# Altium PCB baseControl.PcbDoc
Units mil, origin at the board's own origin, x right, y up, seen from the top; angles counter-clockwise.
Board outline 11915 x 7730 mil, 2 copper layers (Top Layer, Bottom Layer); 108 components, 116 nets, 581 pads, 4 vias.
Unrouted connection lines stored in the file: 430.
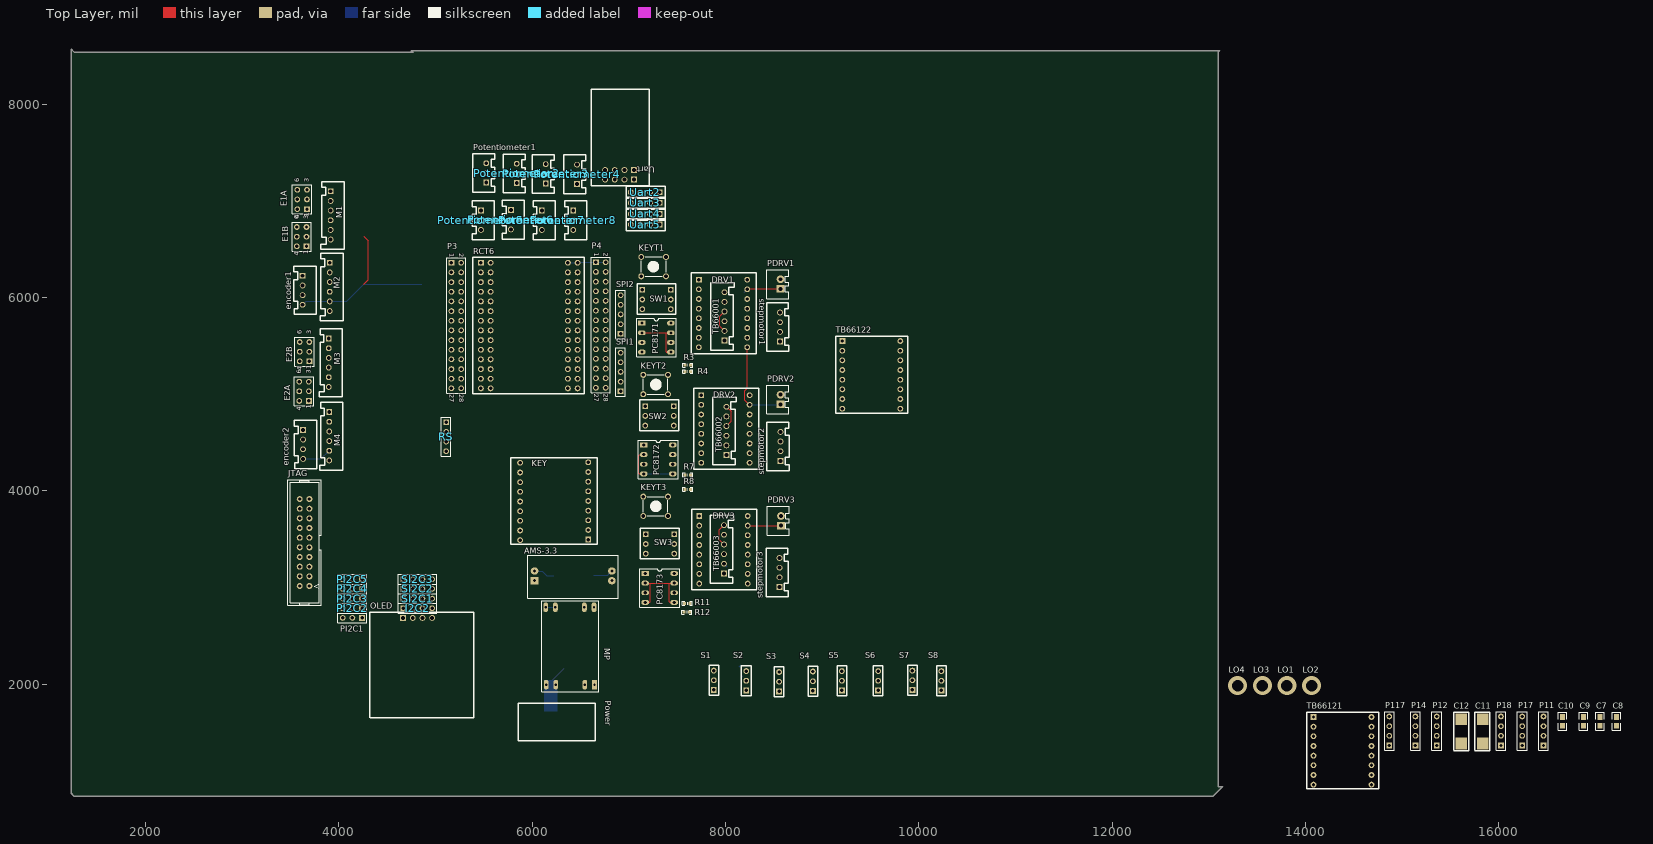
[diagram p0: Top Layer view]
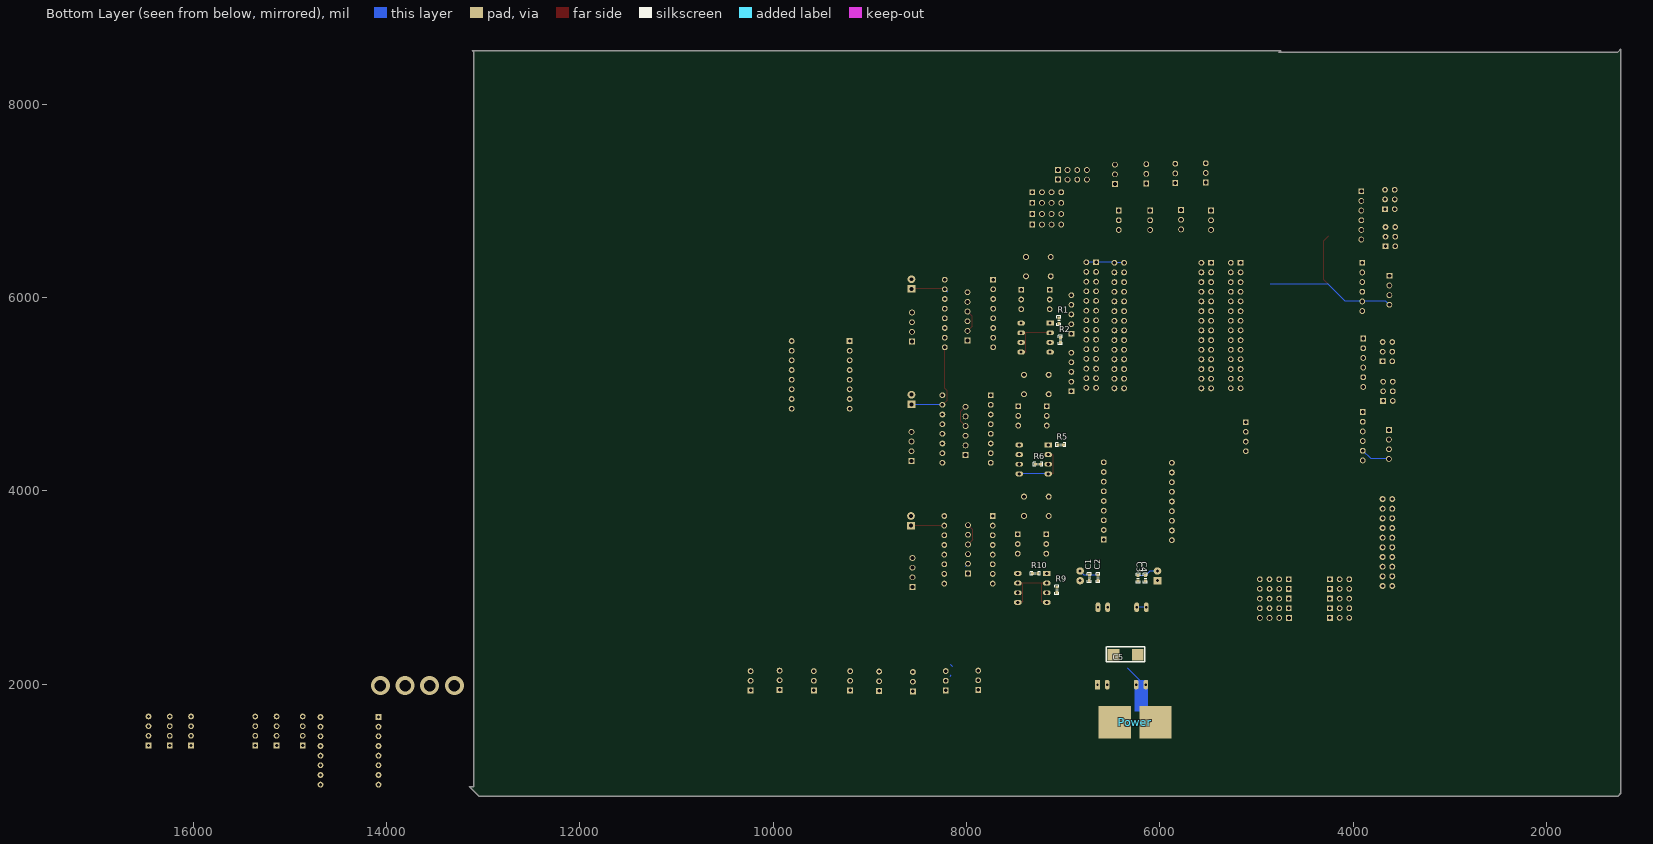
[diagram p1: Bottom Layer view, seen from below]

## Layer stack, top to bottom
Top Layer: signal copper 1.4
Dielectric: dielectric 12.6, FR-4, Dk 4.8
Bottom Layer: signal copper 1.4

## Board outline
4770,8540 1260,8540 1230,8570 1230,870 1260,840 13045,840 13145,940 13100,940 13100,8540 13115,8555 4755,8555 4740,8540

## Design rules (kind name [scope] priority, off if disabled: settings)
Clearance [All] p1: gap=5
PolygonConnect [All] p1: connectstyle=Relief reliefconductorwidth=10 reliefentries=4 polygonreliefangle="90 Angle"
RoutingVias [All] p1: holewidth=28 width=50 viastyle="Through Hole" minholewidth=28 minwidth=50 maxholewidth=28 maxwidth=50
SilkscreenOverComponentPads [All] p1: minsilkscreentomaskgap=10
SolderMaskExpansion [All] p1: expansion=4
Width Width_1 [InNet('VCC5')] p1: maxlimit=25 minlimit=20 preferedwidth=20
Width [InNet('VCC12')] p2: maxlimit=30 minlimit=25 preferedwidth=25
27 further rules are at their usual default settings.

## Classes and differential pairs
component class baseControl2: DRV3 E2A E2B encoder2 KEY KEYT1 KEYT2 KEYT3 LO1 LO2 LO3 LO4 P3 P4 PC8173 Potentiometer1 Potentiometer2 Potentiometer3 Potentiometer4 Potentiometer5 Potentiometer6 Potentiometer7 Potentiometer8 R9 R10 R11 R12 S5 S6 S7 S8 stepmotor1 stepmotor2 stepmotor3 SW1 SW2 SW3 TB66001 TB66002 TB66003
component class baseControl: AMS-3.3 C1 C2 C3 C4 C5 C7 C8 C9 C10 C11 C12 DRV1 DRV2 E1A E1B encoder1 I2C2 JTAG M1 M2 M3 M4 MP OLED P11 P12 P14 P17 P18 P117 PC8171 PC8172 PDRV1 PDRV2 PDRV3 PI2C1 PI2C2 PI2C3 PI2C4 PI2C5 Power R1 R2 R3 R4 R5 R6 R7 R8 RCT6 RS S1 S2 S3 S4 SI2C1 SI2C2 SI2C3 SPI1 SPI2 TB66121 TB66122 Uart Uart2 Uart3 Uart4 Uart5

## Components (designator, comment, footprint, x,y, rotation, side; value= is the part's Value field where it differs from the comment)
AMS-3.3 "AMS1117-3.3" AMS1117-3.3 6820,3070 r180 top
C1 "104" 0603P 6730,3100 r90 bottom
C2 "104" 0603P 6640,3100 r90 bottom
C3 "104" 0603P 6225,3095 r90 bottom
C4 "104" 0603P 6150,3095 r90 bottom
C5 "220uF" 钽电容E 6380,2165 r180 bottom
C7 "104" 0805 17050,1570 r90 top
C8 "104" 0805 17220,1570 r90 top
C9 "104" 0805 16880,1570 r90 top
C10 "104" 0805 16660,1570 r90 top
C11 "220uF" 钽电容E 15975,1485 r90 top
C12 "220uF" 钽电容E 15755,1485 r90 top
DRV1 "DRV8825" DRV8825 7920,6120 r0 top
DRV2 "DRV8825" DRV8825 7945,4925 r0 top
DRV3 "DRV8825" DRV8825 7925,3675 r0 top
E1A "Header 3X2A" HDR2X3_CEN 3670,6915 r90 top
E1B "Header 3X2A" HDR2X3_CEN 3665,6530 r90 top
E2A "Header 3X2A" HDR2X3_CEN 3690,4930 r90 top
E2B "Header 3X2A" HDR2X3_CEN 3695,5340 r90 top
encoder1 "encoder1" XH-4-254 4815,4860 r270 top
encoder2 "encoder2" XH-4-254 4820,3265 r270 top
I2C2 "Header 4" HDR1X4 4665,2785 r0 top
JTAG "JTAG" JTAG_20 3645,3465 r90 top
KEY "KEY" KEY 6000,3745 r180 top
KEYT1 "KEY" KEY_M 7385,6220 r180 top
KEYT2 "KEY" KEY_M 7150,5200 r0 top
KEYT3 "KEY" KEY_M 7150,3940 r0 top
LO1 "螺丝孔" VIA 13810,1985 r0 top
LO2 "螺丝孔" VIA 14065,1985 r0 top
LO3 "螺丝孔" VIA 13555,1985 r0 top
LO4 "螺丝孔" VIA 13300,1985 r0 top
M1 "motor" XH-6-254 4320,7255 r270 top
M2 "motor" XH-6-254 4310,6515 r270 top
M3 "motor" XH-6-254 4300,5730 r270 top locked
M4 "motor" XH-6-254 4305,4970 r270 top locked
MP "MP1584EN" MP1584EN 6590,2560 r270 top
OLED "OLED" OLED_12864 4520,2545 r0 top
P3 "Header 14X2" HDR2X14 5165,6360 r270 top
P4 "Header 14X2" HDR2X14 6660,6365 r270 top
P11 "Header 4" HDR1X4 16465,1365 r90 top
P12 "Header 4" HDR1X4 15360,1365 r90 top
P14 "Header 4" HDR1X4 15140,1365 r90 top
P17 "Header 4" HDR1X4 16245,1365 r90 top
P18 "Header 4" HDR1X4 16025,1365 r90 top
P117 "Header 4" HDR1X4 14870,1365 r90 top
PC8171 "PC817" DIP4 7365,5905 r0 top
PC8172 "PC817" DIP4 7385,4645 r0 top
PC8173 "PC817" DIP4 7400,3315 r0 top
PDRV1 "XH2.54-2P" XH2.54-2P 8575,6140 r90 top
PDRV2 "XH2.54-2P" XH2.54-2P 8575,4945 r90 top
PDRV3 "XH2.54-2P" XH2.54-2P 8580,3690 r90 top
PI2C1 "Header 3" HDR1X3 4240,2685 r180 top
PI2C2 "Header 3" HDR1X3 4240,2785 r180 top
PI2C3 "Header 3" HDR1X3 4240,2885 r180 top
PI2C4 "Header 3" HDR1X3 4240,2985 r180 top
PI2C5 "Header 3" HDR1X3 4240,3085 r180 top
Potentiometer1 "Potentiometer" Potentiometer 5525,7190 r90 top
Potentiometer2 "Potentiometer" Potentiometer 5840,7185 r90 top
Potentiometer3 "Potentiometer" Potentiometer 6140,7180 r90 top
Potentiometer4 "Potentiometer" Potentiometer 6465,7175 r90 top
Potentiometer5 "Potentiometer" Potentiometer 5470,6900 r270 top
Potentiometer6 "Potentiometer" Potentiometer 5780,6905 r270 top
Potentiometer7 "Potentiometer" Potentiometer 6100,6900 r270 top
Potentiometer8 "Potentiometer" Potentiometer 6425,6900 r270 top
Power "P" Power 6485,1620 r180 top
R1 "1.5K" 0603P 7045,5760 r90 bottom
R2 "1.5K" 0603P 7030,5560 r90 bottom
R3 "1.5K" 0603P 7610,5300 r180 top
R4 "1.5K" 0603P 7610,5235 r0 top
R5 "1.5K" 0603P 7025,4475 r180 bottom
R6 "1.5K" 0603P 7260,4275 r0 bottom
R7 "1.5K" 0603P 7610,4165 r180 top
R8 "1.5K" 0603P 7610,4015 r0 top
R9 "1.5K" 0603P 7065,2975 r90 bottom
R10 "1.5K" 0603P 7290,3145 r0 bottom
R11 "1.5K" 0603P 7605,2835 r180 top
R12 "1.5K" 0603P 7600,2745 r0 top
RCT6 "RCT6" STM32F1RCT6 5735,6290 r0 top
RS "Header 4" HDR1X4 5110,4710 r270 top
S1 "sever" 3Pin 7880,1940 r90 top
S2 "sever" 3Pin 8215,1935 r90 top
S3 "sever" 3Pin 8555,1925 r90 top
S4 "sever" 3Pin 8905,1930 r90 top
S5 "sever" 3Pin 9205,1935 r90 top
S6 "sever" 3Pin 9580,1935 r90 top
S7 "sever" 3Pin 9935,1940 r90 top
S8 "sever" 3Pin 10235,1935 r90 top
SI2C1 "Header 4" HDR1X4 4665,2885 r0 top
SI2C2 "Header 4" HDR1X4 4665,2985 r0 top
SI2C3 "Header 4" HDR1X4 4665,3085 r0 top
SPI1 "Header 5" HDR1X5 6915,5030 r90 top
SPI2 "Header 5" HDR1X5 6915,5625 r90 top
stepmotor1 "stepmotor" XH-4-254 7375,6910 r90 top
stepmotor2 "stepmotor" XH-4-254 7380,5675 r90 top
stepmotor3 "stepmotor" XH-4-254 7370,4370 r90 top
SW1 "SW_DIP3" SW_DIP3 7410,6105 r0 top
SW2 "SW_DIP3" SW_DIP3 7440,4900 r0 top
SW3 "SW_DIP3" SW_DIP3 7445,3575 r0 top
TB66001 "TB6600" XH-6-254 7585,5400 r90 top
TB66002 "TB6600" XH-6-254 7605,4215 r90 top
TB66003 "TB6600" XH-6-254 7580,2990 r90 top
TB66121 "TB6612" TB6612 18670,-1885 r0 top
TB66122 "TB6612" TB6612 13795,2005 r0 top
Uart "Uart" uartModel 7050,7230 r180 top
Uart2 "Uart" uart 7025,7100 r180 top
Uart3 "Uart" uart 7025,6990 r180 top
Uart4 "Uart" uart 7025,6875 r180 top
Uart5 "Uart" uart 7025,6765 r180 top

## Footprints (in the part's own frame and the unit in brackets; to place one, negate y for a bottom-side part, rotate by r counter-clockwise, add the part's x,y. Pads: shape width x height; smd on the part's side, far side on the other; paste and mask are expansions set on the pad)
3Pin [mil]
  rect 60x60 hole 35: 1(0,0)
  round 60 hole 35: 2(100,0) 3(200,0)
  silkscreen extent -55,-50 255,50
0603P [mil]
  rect 30x30 smd: 1(-27,0) 2(27.5,-0.06)
  silkscreen extent -50,-20 50,20
0805 [mil]
  rect 60x50 smd: 1(0,-0.06) 2(90,-0.06)
  silkscreen extent -50,-45 140,45
AMS1117-3.3 [mil]
  oval 80x75 hole 32: 1(-5,0) 2(-5,-100) 3(795,-100)
  rect 80x75 hole 32: 4(795,0)
  silkscreen extent -70,-265 865,180
DIP4 [mil]
  rect 80x50 hole 32: 1(-230,-170)
  oval 80x50 hole 32: 2(-230,-270) 3(-230,-370) 4(-230,-470) 5(70,-470) 6(70,-370) 7(70,-270) 8(70,-170)
  silkscreen extent -285,-520 125,-120
DRV8825 [mil]
  rect 60x60 hole 35: 1(-195,65)
  round 60 hole 35: 2(-195,-35) 3(-195,-135) 4(-195,-235) 5(-195,-335) 6(-195,-435) 7(-195,-535) 8(-195,-635) 9(305,-635) 10(305,-535) 11(305,-435) 12(305,-335) 13(305,-235) 14(305,-135) 15(305,-35) 16(305,65)
  silkscreen extent -275,-700 400,135
HDR1X3 [mm] "Connector; Header; 3 Position"
  rect 1.5x1.5 hole 0.9: 1(0,0)
  round 1.5 hole 0.9: 2(2.54,0) 3(5.08,0)
  silkscreen extent -1.27,-1.27 6.35,1.27
HDR1X4 [mm] "Connector; Header; 4 Position"
  rect 1.5x1.5 hole 0.9: 1(0,0)
  round 1.5 hole 0.9: 2(2.54,0) 3(5.08,0) 4(7.62,0)
  silkscreen extent -1.27,-1.27 8.89,1.27
HDR1X5 [mm] "Connector; Header; 5 Position"
  rect 1.5x1.5 hole 0.9: 1(0,0)
  round 1.5 hole 0.9: 2(2.54,0) 3(5.08,0) 4(7.62,0) 5(10.16,0)
  silkscreen extent -1.27,-1.27 11.43,1.27
HDR2X3_CEN [mm] "Connector; Header; 3x2 Position"
  rect 1.5x1.5 hole 0.9: 1(0,0)
  round 1.5 hole 0.9: 2(2.54,0) 3(5.08,0) 4(0,2.54) 5(2.54,2.54) 6(5.08,2.54)
  silkscreen extent -1.27,-1.27 6.35,3.81
HDR2X14 [mm] "Connector; Header; 14x2 Position"
  rect 1.5x1.5 hole 0.9: 1(0,0)
  round 1.5 hole 0.9: 2(0,2.54) 3(2.54,0) 4(2.54,2.54) 5(5.08,0) 6(5.08,2.54) 7(7.62,0) 8(7.62,2.54) 9(10.16,0) 10(10.16,2.54) 11(12.7,0) 12(12.7,2.54) 13(15.24,0) 14(15.24,2.54) 15(17.78,0) 16(17.78,2.54) 17(20.32,0) 18(20.32,2.54) 19(22.86,0) 20(22.86,2.54) 21(25.4,0) 22(25.4,2.54) 23(27.94,0) 24(27.94,2.54) 25(30.48,0) 26(30.48,2.54) 27(33.02,0) 28(33.02,2.54)
  silkscreen extent -1.27,-1.27 34.29,3.81
JTAG_20 [mil]
  round 62 hole 35: 1(-450,-50) 2(-450,50) 3(-350,-50) 4(-350,50) 5(-250,-50) 6(-250,50) 7(-150,-50) 8(-150,50) 9(-50,-50) 10(-50,50) 11(50,-50) 12(50,50) 13(150,-50) 14(150,50) 15(250,-50) 16(250,50) 17(350,-50) 18(350,50) 19(450,-50) 20(450,50)
  silkscreen extent -650,-175 650,175
KEY [mil]
  rect 60x60 hole 35: 1(-580,250)
  round 60 hole 35: 2(-580,150) 3(-580,50) 4(-580,-50) 5(-580,-150) 6(-580,-250) 7(-580,-350) 8(-580,-450) 9(-580,-550) 10(125,-545) 11(125,-445) 12(125,-345) 13(125,-245) 14(125,-145) 15(125,-45) 16(125,55) 17(125,155) 18(125,255)
  silkscreen extent -675,-595 220,300
KEY_M [mil]
  round 62 hole 38: 1(0,0) 1(255.91,0) 2(0,-200) 2(255.91,-200)
  silkscreen extent 0,-200 255,0
MP1584EN [mil]
  rect 100x50 hole 25: 1(565,55)
  oval 100x50 hole 25: 2(565,-45) 3(565,-345) 4(565,-445) 5(-235,-450) 6(-235,-350) 7(-235,-50) 8(-235,50)
  silkscreen extent -300,-490 640,100
OLED_12864 [mil]
  rect 60x60 hole 40: 1(145,140)
  round 60 hole 40: 2(245,140) 3(345,140) 4(445,140)
  silkscreen extent -200,-895 875,200
Potentiometer [mil]
  rect 60x60 hole 40: 1(0,0)
  round 60 hole 40: 2(100,0) 3(200,0)
  silkscreen extent -100,-90 300,140
Power [mil]
  rect 334.65x334.65 smd far side: 1(20,15) 2(440,15)
  silkscreen extent -170,-180 630,205
STM32F1RCT6 [mil]
  rect 60x60 hole 35: 1(-265,70)
  round 60 hole 35: 2(-165,70) 3(-265,-30) 4(-165,-30) 5(-265,-130) 6(-165,-130) 7(-265,-230) 8(-165,-230) 9(-265,-330) 10(-165,-330) 11(-265,-430) 12(-165,-430) 13(-265,-530) 14(-165,-530) 15(-265,-630) 16(-165,-630) 17(-265,-730) 18(-165,-730) 19(-265,-830) 20(-165,-830) 21(-265,-930) 22(-165,-930) 23(-265,-1030) 24(-165,-1030) 25(-265,-1130) 26(-165,-1130) 27(-265,-1230) 28(-165,-1230) 29(635,-1230) 30(735,-1230) 31(635,-1130) 32(735,-1130) 33(635,-1030) 34(735,-1030) 35(635,-930) 36(735,-930) 37(635,-830) 38(735,-830) 39(635,-730) 40(735,-730) 41(635,-630) 42(735,-630) 43(635,-530) 44(735,-530) 45(635,-430) 46(735,-430) 47(635,-330) 48(735,-330) 49(635,-230) 50(735,-230) 51(635,-130) 52(735,-130) 53(635,-30) 54(735,-30) 55(635,70) 56(735,70)
  silkscreen extent -350,-1285 805,125
SW_DIP3 [mil]
  rect 60x60 hole 35: 1(-270,-25) 2(25,-25)
  round 60 hole 35: 3(-270,-125) 4(25,-125) 5(-270,-225) 6(25,-225)
  silkscreen extent -325,-280 75,40
TB6612 [mil]
  rect 60x60 hole 35: 1(-4585,3545)
  round 60 hole 35: 2(-4585,3445) 3(-4585,3345) 4(-4585,3245) 5(-4585,3145) 6(-4585,3045) 7(-4585,2945) 8(-4585,2845) 9(-3985,2845) 10(-3985,2945) 11(-3985,3045) 12(-3985,3145) 13(-3985,3245) 14(-3985,3345) 15(-3985,3445) 16(-3985,3545)
  silkscreen extent -4655,2800 -3910,3595
uart [mil]
  rect 60x60 hole 40: 1(-295,10)
  round 60 hole 40: 2(-195,10) 3(-95,10) 4(5,10)
  silkscreen extent -350,-50 50,75
uartModel [mil]
  rect 60x60 hole 40: 1(-5,10) 1(-5,-90)
  round 60 hole 40: 2(95,10) 2(95,-90) 3(195,-90) 3(195,10) 4(295,-90) 4(295,10)
  silkscreen extent -160,-925 440,75
VIA [mil]
XH2.54-2P [mil]
  rect 80x80 hole 40: 1(-50,5)
  round 80 hole 40: 2(50,5)
  silkscreen extent -150,-80 150,145
XH-4-254 [mil]
  rect 60x60 hole 40: 1(-1365,-1190)
  round 60 hole 40: 2(-1265,-1190) 3(-1165,-1190) 4(-1065,-1190)
  silkscreen extent -1465,-1280 -965,-1050
XH-6-254 [mil]
  rect 60x60 hole 40: 1(155,-405)
  round 60 hole 40: 2(255,-405) 3(355,-405) 4(455,-405) 5(555,-405) 6(655,-405)
  silkscreen extent 55,-505 755,-265
钽电容E [mil]
  rect 120x120 smd: 1(-100,140) 2(150,140)
  silkscreen extent -175,65 225,220

## Part data
C1 C2 C3 C4 C5 C7 C8 C9 C10 C11 C12: library part C
E1A E1B E2A E2B: "Header, 3-Pin, Dual row"
encoder1 encoder2: library part encoder
I2C2 P11 P12 P14 P17 P18 P117 RS SI2C1 SI2C2 SI2C3: "Header, 4-Pin"
JTAG: library part JTAG_20
LO1 LO2 LO3 LO4: library part 螺丝
M1 M2 M3 M4: library part XH-6-254
OLED: library part OLED_12864
P3 P4: "Header, 14-Pin, Dual row"
PI2C1 PI2C2 PI2C3 PI2C4 PI2C5: "Header, 3-Pin"
Power: library part Power
R1 R2 R3 R4 R5 R6 R7 R8 R9 R10 R11 R12: library part R
RCT6: library part STM32F1RCT6
SPI1 SPI2: "Header, 5-Pin"

## Via types
v1: diameter 196.85, hole 118.11, Top Layer to Bottom Layer, 4 vias

## Nets (pads, with @x,y where several pads share a name; then routed paths per layer and width w, separated by ;. In a path a pad name is that pad's centre, name@x,y a point inside that pad or via, vN(x,y) a via of type N, cw(c..) or ccw(c..) an arc to the next point about the centre after c; other vN are vias at no path point)
BAT: P3.14 RCT6.14
D1A1: DRV1.12 stepmotor1.2
D1A2: DRV1.11 stepmotor1.1
D1B1: DRV1.13 stepmotor1.3
D1B2: DRV1.14 stepmotor1.4
D1DIR: DRV1.8 PC8171.6 R4.2 TB66001.3
D1EN: DRV1.1 KEYT1.2 TB66001.1
D1M0: DRV1.2 SW1.2
D1M1: DRV1.3 SW1.4
D1M2: DRV1.4 SW1.6
D1STEP: DRV1.7 PC8171.8 R3.1 TB66001.5
D2A1: DRV2.12 stepmotor2.2
D2A2: DRV2.11 stepmotor2.1
D2B1: DRV2.13 stepmotor2.3
D2B2: DRV2.14 stepmotor2.4
D2DIR: DRV2.8 PC8172.6 R8.2 TB66002.3
D2EN: DRV2.1 KEYT2.2 TB66002.1
D2M0: DRV2.2 SW2.2
D2M1: DRV2.3 SW2.4
D2M2: DRV2.4 SW2.6
D2STEP: DRV2.7 PC8172.8 R7.1 TB66002.5
D3A1: DRV3.12 stepmotor3.2
D3A2: DRV3.11 stepmotor3.1
D3B1: DRV3.13 stepmotor3.3
D3B2: DRV3.14 stepmotor3.4
D3DIR: DRV3.8 PC8173.6 R12.2 TB66003.3
D3EN: DRV3.1 KEYT3.2 TB66003.1
D3M0: DRV3.2 SW3.2
D3M1: DRV3.3 SW3.4
D3M2: DRV3.4 SW3.6
D3STEP: DRV3.7 PC8173.8 R11.1 TB66003.5
E1A: E1A.1 encoder1.2
E1B: E1B.1 encoder1.3
E2A: E2A.1 encoder2.2
E2B: E2B.1 encoder2.3
GND: AMS-3.3.2 AMS-3.3.3 C1.2 C2.2 C3.2 C4.2 C5.2 C7.2 C8.2 C9.2 C10.2 C11.2 C12.2 DRV1.9 DRV1.15 DRV2.9 DRV2.15 DRV3.9 DRV3.15 encoder1.4 encoder2.4 I2C2.2 JTAG.4 JTAG.6 JTAG.8 JTAG.10 JTAG.12 JTAG.14 JTAG.16 JTAG.18 JTAG.20 KEY.14 M1.5 M2.5 M3.5 M4.5 MP.3 MP.4 MP.5 MP.6 OLED.2 P3.27 P4.1 P4.2 P11.3 P12.3 P14.3 P17.3 P18.3 P117.3 PC8171.2 PC8171.4 PC8171.5 PC8171.7 PC8172.2 PC8172.4 PC8172.5 PC8172.7 PC8173.2 PC8173.4 PC8173.5 PC8173.7 PDRV1.1 PDRV2.1 PDRV3.1 Potentiometer1.3 Potentiometer2.3 Potentiometer3.3 Potentiometer4.3 Potentiometer5.3 Potentiometer6.3 Potentiometer7.3 Potentiometer8.3 Power.2 RCT6.27 RCT6.55 RCT6.56 S1.1 S2.1 S3.1 S4.1 S5.1 S6.1 S7.1 S8.1 SI2C1.2 SI2C2.2 SI2C3.2 SPI1.2 SPI2.2 TB66001.2 TB66001.4 TB66001.6 TB66002.2 TB66002.4 TB66002.6 TB66003.2 TB66003.4 TB66003.6 TB66121.3 TB66121.8 TB66121.9 TB66122.8 TB66122.9 Uart2.2 Uart3.2 Uart4.2 Uart5.2 Uart.2 | length 7206
  Top Layer w10: PC8171.2 7390,5635 ; PC8172.4 7110,4175 7105,4180 7105,4370 7110,4375 PC8172.2 ; PC8173.4 7215,2845 7220,2850 7220,3040 7215,3045 ; PC8173.2 7215,3045 ; PC8171.5 7390,5435 7385,5440 7385,5630 7390,5635 ; PC8171.7 7390,5635 ; PC8173.5 7425,2845 7420,2850 7420,3040 7425,3045 ; PC8173.7 7425,3045 ; TB66003.4 7937,3493 7937,3597 TB66003.6 ; TB66001.2 7942,5703 7942,5807 TB66001.4 ; TB66002.4 8058,4718 8058,4822 TB66002.6 ; DRV1.9 8225,5061 8202,5038 8202,4938 DRV2.15 ; DRV1.15 8230,6090 PDRV1.1 ; DRV3.15 PDRV3.1 ; 7215,3045 7425,3045
  Bottom Layer w10: encoder1.4 3660,5960 M2.5 4080,5960 4255,6135 4855,6135 ; encoder2.4 3815,4330 M4.5 ; AMS-3.3.3 6102.44,3170 C4.2 C3.2 ; MP.5 MP.6 ; MP.4 6160,1995 6330,2165 ; RCT6.55 RCT6.56 6475,6365 P4.1 P4.2 ; C2.2 C1.2 6782.5,3127.5 AMS-3.3.2 ; PC8172.4 PC8172.5 ; TB66003.2 8014,3216 ; 8195,6055 DRV1.15 ; DRV2.15@8250,4900 DRV2.15 8565,4890 PDRV2.1 ; PDRV1.1@8555,6085 8560,6080 PDRV1.1@8570,6070
M1EA: E1A.3 M1.3
M1EB: E1B.3 M1.4
M2EA: E1A.2 M2.3
M2EB: E1B.2 M2.4
M3EA: E2A.3 M3.3
M3EB: E2B.3 M3.4
M4EA: E2A.2 M4.3
M4EB: E2B.2 M4.4
NetPC8171_1: PC8171.1 R1.1
NetPC8171_3: PC8171.3 R2.1
NetPC8172_1: PC8172.1 R5.1
NetPC8172_3: PC8172.3 R6.1
NetPC8173_1: PC8173.1 R10.1
NetPC8173_3: PC8173.3 R9.1
PA0: P3.23 R1.2 RCT6.23 TB66121.10
PA1: P3.24 RCT6.24 TB66121.16
PA2: P3.25 RCT6.25 TB66122.16 Uart2.3
PA3: P4.27 RCT6.29 TB66122.10 Uart2.4
PA4: P4.28 R2.2 RCT6.30 TB66121.11
PA5: KEY.8 P4.25 RCT6.31 SPI1.5
PA6: E1A.4 E1A.5 E1A.6 KEY.2 P4.26 R5.2 RCT6.32 S6.3 SPI1.3
PA7: E1B.4 E1B.5 E1B.6 KEY.3 P4.23 RCT6.33 S5.3 SPI1.4
PA8: P4.7 RCT6.49
PA9: P4.8 RCT6.50 Uart.4
PA10: P4.5 RCT6.51 Uart.3@6855,7220
PA11: P4.6 RCT6.52
PA12: P4.3 R6.2 RCT6.53 TB66121.14
PA13: JTAG.7 P4.4 RCT6.54
PA14: JTAG.9 P3.1 RCT6.1
PA15: P3.2 RCT6.2 TB66121.15
PB0: KEY.4 P4.22 Potentiometer8.2 RCT6.36 S4.3
PB1: KEY.1 P4.19 Potentiometer3.2 RCT6.37 S7.3
PB2: P4.20 RCT6.38 TB66121.12
PB3: KEY.16 P3.7 P12.2 RCT6.7 SI2C1.3
PB4: I2C2.4 KEY.17 P3.8 P11.1 RCT6.8
PB5: KEY.15 P3.9 P117.2 RCT6.9 SI2C2.3
PB6: E2A.4 E2A.5 E2A.6 OLED.3 P3.10 P17.2 P18.2 RCT6.10 S2.3
PB7: E2B.4 E2B.5 E2B.6 OLED.4 P3.11 P17.1 P18.1 RCT6.11 S3.3
PB8: KEY.9 P3.12 R9.2 RCT6.12 S8.3
PB9: KEY.18 P3.13 P117.1 RCT6.13 S1.3 SI2C2.4
PB10: I2C2.3 P4.17 P11.2 RCT6.39 Uart3.3
PB11: P4.18 P12.1 RCT6.40 SI2C1.4 Uart3.4
PB12: P4.15 RCT6.41 TB66122.11
PB13: P4.16 RCT6.42 SPI2.3
PB14: P4.13 RCT6.43 SPI2.5
PB15: P4.14 RCT6.44 SPI2.4
PC0: KEY.13 P3.19 Potentiometer5.2 RCT6.19 RS.4
PC1: KEY.12 P3.20 Potentiometer2.2 RCT6.20 RS.3
PC2: KEY.11 P3.21 Potentiometer1.2 RCT6.21 RS.2
PC3: KEY.10 P3.22 Potentiometer6.2 RCT6.22 RS.1
PC4: KEY.6 P4.24 Potentiometer4.2 RCT6.34
PC5: KEY.7 P4.21 Potentiometer7.2 RCT6.35
PC6: P4.11 RCT6.45 TB66122.12
PC7: P4.12 RCT6.46 TB66122.14
PC8: P4.9 RCT6.47 TB66122.15
PC9: P4.10 R10.2 RCT6.48
PC10: P3.3 RCT6.3 Uart4.3
PC11: P3.4 RCT6.4 Uart4.4
PC12: P3.5 P14.2 RCT6.5 SI2C3.3 Uart5.3
PC13: P3.15 RCT6.15
PC14: P3.16 RCT6.16
PC15: P3.17 RCT6.17
PD2: P3.6 P14.1 RCT6.6 SI2C3.4 Uart5.4 | length 31.8
  Bottom Layer w10: 8142.5,2180 8165,2202.5
RST: P3.18 RCT6.18
T1A1: M1.1 TB66121.4
T1A2: M1.6 TB66121.5
T1B1: M2.6 TB66121.7
T1B2: M2.1 TB66121.6
T2A1: M3.1 TB66122.4
T2A2: M3.6 TB66122.5
T2B1: M4.6 TB66122.7
T2B2: M4.1 TB66122.6
VCC3.3: AMS-3.3.4 C3.1 C4.1 KEY.5 P3.26 PI2C1.3 PI2C2.3 PI2C3.3 PI2C4.3 PI2C5.3 Potentiometer1.1 Potentiometer2.1 Potentiometer3.1 Potentiometer4.1 Potentiometer5.1 Potentiometer6.1 Potentiometer7.1 Potentiometer8.1 RCT6.26
VCC5: AMS-3.3.1 C1.1 C2.1 C7.1 C8.1 C9.1 C10.1 DRV1.5 DRV1.6 DRV2.5 DRV2.6 DRV3.5 DRV3.6 encoder1.1 encoder2.1 JTAG.1 JTAG.2 KEYT1.1 KEYT2.1 KEYT3.1 M1.2 M2.2 M3.2 M4.2 MP.7 MP.8 P3.28 PI2C1.1 PI2C2.1 PI2C3.1 PI2C4.1 PI2C5.1 R3.2 R4.1 R7.2 R8.1 R11.2 R12.1 RCT6.28 S1.2 S2.2 S3.2 S4.2 S5.2 S6.2 S7.2 S8.2 SPI1.1 SPI2.1 SW1.1 SW1.3 SW1.5 SW2.1 SW2.3 SW2.5 SW3.1 SW3.3 SW3.5 TB66121.2 TB66121.13 TB66122.2 TB66122.13 Uart2.1 Uart3.1 Uart4.1 Uart5.1 Uart.1@7055,7220 | length 17
  Bottom Layer w0: 8162.5,2090 8174.5,2078
VCC12: C5.1 C11.1 C12.1 DRV1.16 DRV2.16 DRV3.16 MP.1 MP.2 PDRV1.2 PDRV2.2 PDRV3.2 Power.1 TB66121.1 TB66122.1
VCCI2C1: OLED.1 P17.4 P18.4 PI2C1.2
VCCI2C2: I2C2.1 P11.4 PI2C2.2
VCCI2C3: P12.4 PI2C3.2 SI2C1.1
VCCI2C4: P117.4 PI2C4.2 SI2C2.1
VCCI2C5: P14.4 PI2C5.2 SI2C3.1
pads on no net: DRV1.10 DRV2.10 DRV3.10 JTAG.3 JTAG.5 JTAG.11 JTAG.13 JTAG.15 JTAG.17 JTAG.19 TB66122.3 Uart.1@7055,7320 Uart.3@6855,7320
copper on no net: | length 539.8
  Top Layer w10: 4255,6135 4303,6183 4303,6587 4255,6635
  other v1: 13300,1985 13555,1985 13810,1985 14065,1985

## Other copper
Bottom Layer:
  rectangle: 6125,1715 6260,2045

## Text inside footprints (layer, text, board x,y; h text height)
E1A: Top Overlay "4" at 3590,6815 h50 r90; Top Overlay "1" at 3690,6835 h50 r90; Top Overlay "3" at 3690,7195 h50 r90; Top Overlay "6" at 3590,7195 h50 r90
E1B: Top Overlay "4" at 3585,6430 h50 r90; Top Overlay "1" at 3685,6450 h50 r90; Top Overlay "3" at 3685,6810 h50 r90; Top Overlay "6" at 3585,6810 h50 r90
E2A: Top Overlay "4" at 3610,4830 h50 r90; Top Overlay "1" at 3710,4850 h50 r90; Top Overlay "3" at 3710,5210 h50 r90; Top Overlay "6" at 3610,5210 h50 r90
E2B: Top Overlay "4" at 3615,5240 h50 r90; Top Overlay "1" at 3715,5260 h50 r90; Top Overlay "3" at 3715,5620 h50 r90; Top Overlay "6" at 3615,5620 h50 r90
P3: Top Overlay "28" at 5245,5000 h50 r270; Top Overlay "27" at 5145,5000 h50 r270; Top Overlay "1" at 5145,6460 h50 r270; Top Overlay "2" at 5245,6460 h50 r270
P4: Top Overlay "28" at 6740,5005 h50 r270; Top Overlay "27" at 6640,5005 h50 r270; Top Overlay "1" at 6640,6465 h50 r270; Top Overlay "2" at 6740,6465 h50 r270